# Altium PCB PCB.PcbDoc
Units mm, origin at the board's own origin, x right, y up, seen from the top; angles counter-clockwise.
Board outline 21.84 x 61.98 mm, 2 copper layers (Top Layer, Bottom Layer), stack 1.271 mm thick; 9 components, 0 nets, 138 pads, 9 vias.
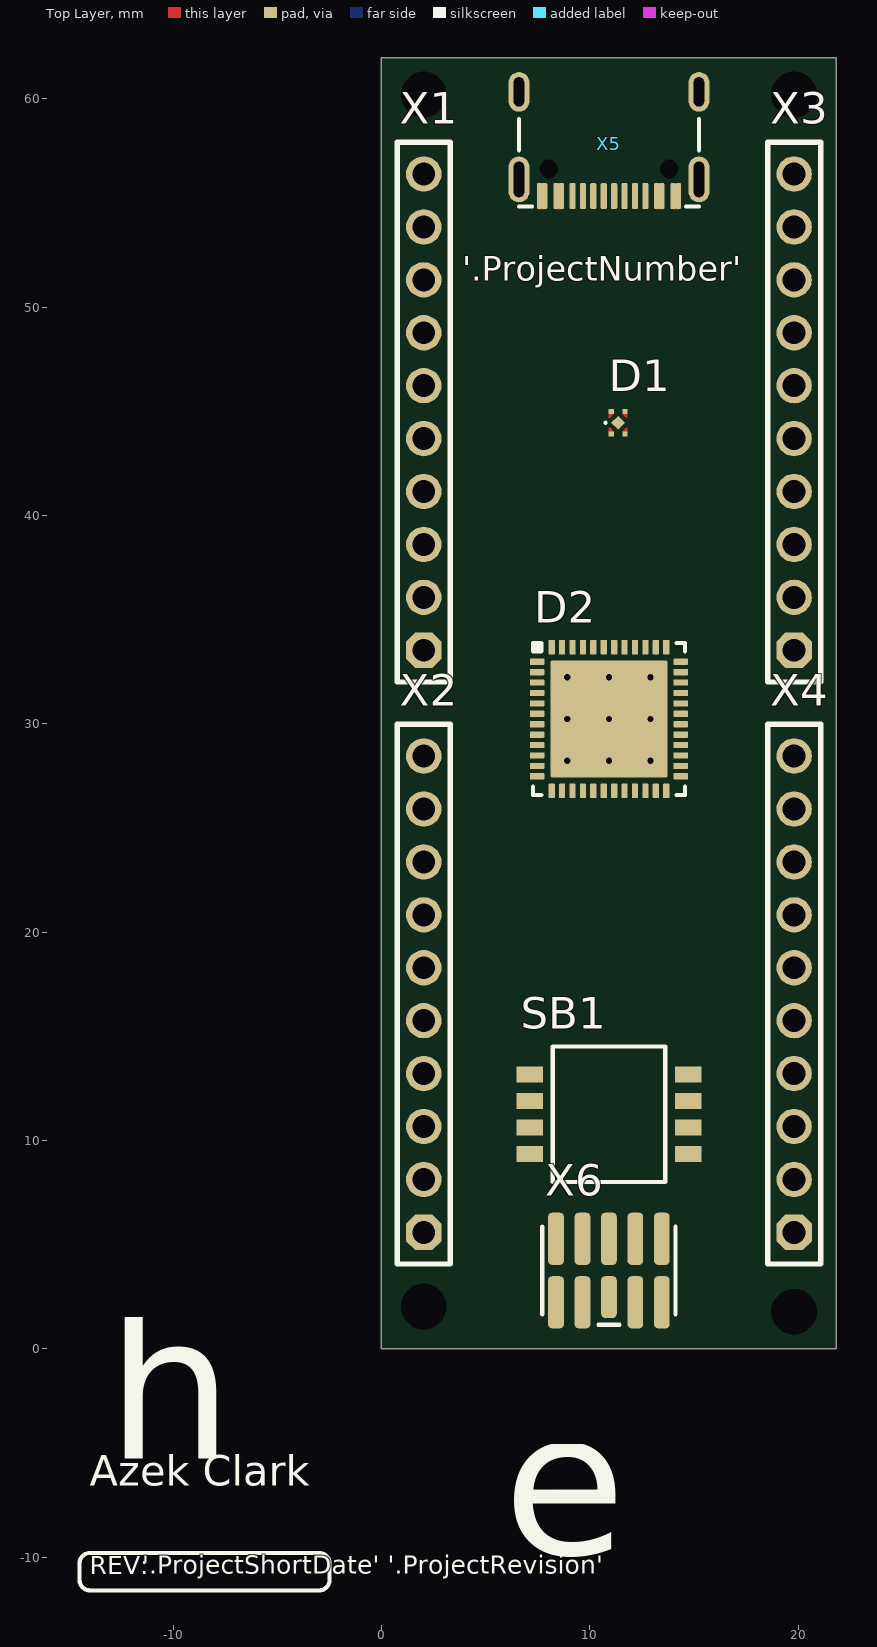
[diagram p0: Top Layer view]
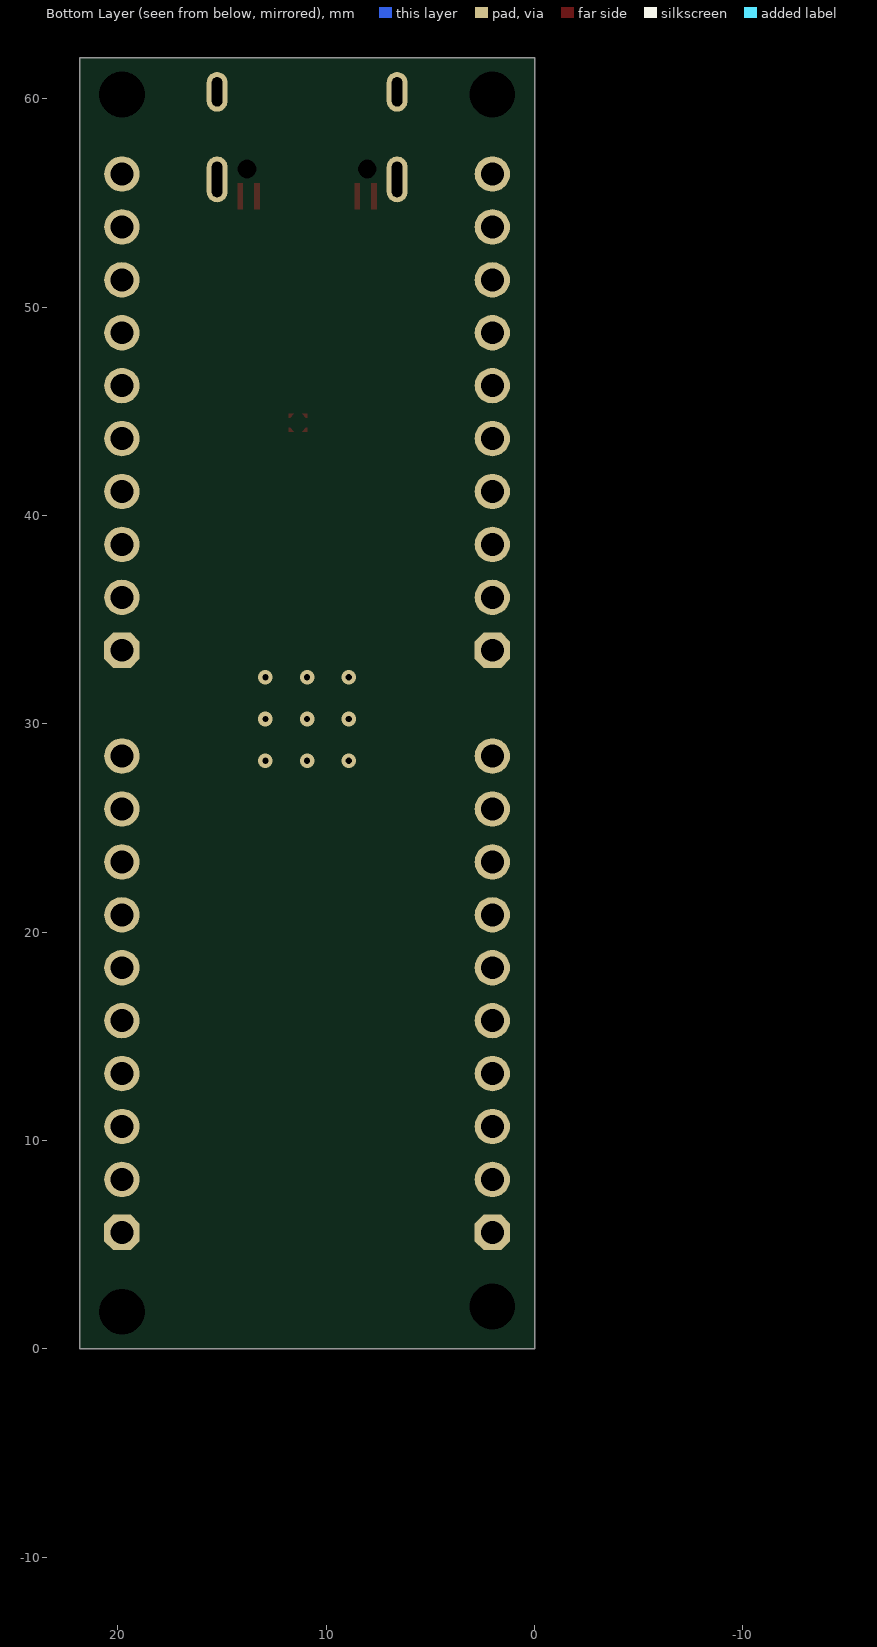
[diagram p1: Bottom Layer view, seen from below]

## Layer stack, top to bottom
Top Solder: solder mask 0.0102, Solder Resist, Dk 3.5
Top Layer: signal copper 0.0356
Dielectric 1: dielectric 1.2, FR-4, Dk 4.8
Bottom Layer: signal copper 0.0356
Bottom Solder: solder mask 0.0102, Solder Resist, Dk 3.5

## Board outline
0,0 0,61.976 21.844,61.976 21.844,0

## Design rules (kind name [scope] priority, off if disabled: settings)
AcuteAngle [All] p1: minimum=4.50000000000000E+0001 checktracksonly=TRUE
BoardOutlineClearance [All] p1: gap=0.3 ignorepadtopadclearanceinfootprint=FALSE
Clearance Clearance_NPTH [All vs InPadClass('NPTH')] p1: gap=0.4 ignorepadtopadclearanceinfootprint=FALSE except(0: Arc-Hole Track-Hole SMDPad-Hole THPad-Hole Via-Hole Fill-Hole Poly-Hole Region-Hole Text-Hole)
Clearance Clearance_MultiLayerPad [OnLayer('Multi-Layer') and IsPad] p2: gap=0.25 ignorepadtopadclearanceinfootprint=FALSE except(0: Arc-Hole Track-Hole SMDPad-Hole THPad-Hole Via-Hole Fill-Hole Poly-Hole Region-Hole Text-Hole)
Clearance Clearance_Polygon [InPolygon] p3: gap=0.2 ignorepadtopadclearanceinfootprint=FALSE except(0: Arc-Hole Track-Hole SMDPad-Hole THPad-Hole Via-Hole Fill-Hole Poly-Hole Region-Hole Text-Hole)
Clearance [All] p4: gap=0.15 ignorepadtopadclearanceinfootprint=FALSE except(0: Arc-Hole Track-Hole SMDPad-Hole THPad-Hole Via-Hole Fill-Hole Poly-Hole Region-Hole Text-Hole; 0.127: Arc-Arc Arc-Track Track-Track)
ComponentClearance [All] p1: gap=0.254 collisioncheckmode=3 verticalgap=0.2 showdistances=FALSE
DiffPairsRouting [All] p1: maxlimit=0.254 minlimit=0.2 mostfreqgap=0.254 toplayer_minwidth=0.2 toplayer_maxwidth=0.5 toplayer_prefwidth=0.3 bottomlayer_minwidth=0.2 bottomlayer_maxwidth=0.5 bottomlayer_prefwidth=0.3 maxuncoupledlength=12.7
Height [All] p1: minheight=0 maxheight=60 prefheight=12.7
HoleSize [All] p1: absolutevalues=TRUE maxlimit=6.3 minlimit=0.3 maxpercent=80.000 minpercent=20.000
HoleToHoleClearance [All] p1: gap=0.5 allowstackedmicrovias=TRUE
MinimumAnnularRing [All] p1: minimumring=0.13
MinimumSolderMaskSliver [All] p1: minsoldermaskwidth=0.05
PasteMaskExpansion [All] p1: expansion=-0.05
PlaneClearance [All] p1: clearance=0.5
PlaneConnect [All] p1: planeconnectstyle=Relief reliefexpansion=0.5 reliefentries=4 reliefconductorwidth=0.3 reliefairgap=0.2
PolygonConnect PolygonConnect_PowerPAD [All vs InPadClass('PowerPAD')] p1: connectstyle=Relief reliefconductorwidth=1 reliefentries=4 polygonreliefangle="90 Angle" airgapwidth=0.3
PolygonConnect PolygonConnect_PadGND [InNet('GND') and IsPad] p2: connectstyle=Relief reliefconductorwidth=0.5 reliefentries=4 polygonreliefangle="90 Angle" airgapwidth=0.2
PolygonConnect PolygonConnect_Via [IsVia] p3: connectstyle=Direct reliefconductorwidth=0.254 reliefentries=4 polygonreliefangle="90 Angle" airgapwidth=0.254
PolygonConnect [All] p4: connectstyle=Relief reliefconductorwidth=0.6 reliefentries=4 polygonreliefangle="90 Angle" airgapwidth=0.3
RoomDefinition MCU-Debug [InComponentClass('MCU-Debug')] p1: confinementstyle=ConfineIn formatcopy=TRUE lockcomponents=FALSE outline 6,0.504 15.75,0.504 15.75,15.004 6,15.004
RoomDefinition Connector-USB [InComponentClass('Connector-USB')] p2: confinementstyle=ConfineIn formatcopy=TRUE lockcomponents=FALSE outline 5.798,54.4 5.798,63.233 16.046,63.233 16.046,54.4
RoomDefinition Connector-Side-2 [InComponentClass('Connector-Side-2')] p3: confinementstyle=ConfineIn formatcopy=TRUE lockcomponents=FALSE outline 18.002,3.524 21.558,3.524 21.558,58.388 18.002,58.388
RoomDefinition Connector-Side-1 [InComponentClass('Connector-Side-1')] p4: confinementstyle=ConfineIn formatcopy=TRUE lockcomponents=FALSE outline 0.222,3.524 3.778,3.524 3.778,58.388 0.222,58.388
RoomDefinition "Power Supply" [InComponentClass('Power Supply')] p5: confinementstyle=ConfineIn formatcopy=TRUE lockcomponents=FALSE outline 10.022,43.434 12.922,43.434 12.922,47.834 10.022,47.834
RoomDefinition MCU-Power [InComponentClass('MCU-Power')] p6: confinementstyle=ConfineIn formatcopy=TRUE lockcomponents=FALSE outline 6.818,26.122 6.818,34.33 15.026,34.33 15.026,26.122
RoutingVias [All] p1: holewidth=0.3 width=0.7 viastyle="Through Hole" minholewidth=0.3 minwidth=0.6 maxholewidth=0.5 maxwidth=1.2
SilkToSilkClearance [All] p1: silktosilkclearance=0
SilkToSolderMaskClearance [IsPad] p1: minsilkscreentomaskgap=0.15 clearancetoexposedcopper=TRUE
SolderMaskExpansion SolderMaskExpansion_VIa [isVia] p1: expansion=0.102 istentingtop=TRUE
SolderMaskExpansion [All] p2: expansion=0.05 istentingtop=FALSE
UnRoutedNet [All] p1: checkbadconnections=TRUE
Width [All] p1: maxlimit=10 minlimit=0.127 preferedwidth=0.2
18 further rules are at their usual default settings.

## Classes and differential pairs
component class MCU-Debug: SB1 X6
component class Connector-USB: X5
component class Connector-Side-2: X3 X4
component class Connector-Side-1: X1 X2
component class "Power Supply": D1
component class MCU-Power: D2

## Components (designator, comment, footprint, x,y, rotation, side; value= is the part's Value field where it differs from the comment)
D1 "AP7343D-xXXFS4-7B" DFN1010-4 11.362,44.448 r0 top
D2 "STM32F411CxU6" 48-UFQFPN 10.922,30.226 r0 top
SB1 "" "BUT: DSHP04TS" 10.922,11.254 r90 top
X1 "PBSL-10" "CON: PBSL-10" 2.032,44.958 r90 top
X2 "PBSL-10" "CON: PBSL-10" 2.032,17.018 r90 top
X3 "PBSL-10" "CON: PBSL-10" 19.812,44.958 r90 top
X4 "PBSL-10" "CON: PBSL-10" 19.812,17.018 r90 top
X5 "918-418K2023S40001" "CON:  918-418K2023S40001" 10.922,58.954 r180 top
X6 "" "CON: PLLD-1.27-10" 10.922,3.754 r0 top

## Footprints (in the part's own frame and the unit in brackets; to place one, negate y for a bottom-side part, rotate by r counter-clockwise, add the part's x,y. Pads: shape width x height; smd on the part's side, far side on the other; paste and mask are expansions set on the pad)
48-UFQFPN [mm] "48-lead, 7 x 7 mm, 0.5 mm pitch"
  rrect2% 5.6x5.6 smd paste-10: 0(0,0)
  rrect25% 0.7x0.3 smd paste-0.025: 1(-3.45,2.75) 2(-3.45,2.25) 3(-3.45,1.75) 4(-3.45,1.25) 5(-3.45,0.75) 6(-3.45,0.25) 7(-3.45,-0.25) 8(-3.45,-0.75) 9(-3.45,-1.25) 10(-3.45,-1.75) 11(-3.45,-2.25) 12(-3.45,-2.75) 25(3.45,-2.75) 26(3.45,-2.25) 27(3.45,-1.75) 28(3.45,-1.25) 29(3.45,-0.75) 30(3.45,-0.25) 31(3.45,0.25) 32(3.45,0.75) 33(3.45,1.25) 34(3.45,1.75) 35(3.45,2.25) 36(3.45,2.75)
  rrect25% 0.3x0.7 smd paste-0.025: 13(-2.75,-3.45) 14(-2.25,-3.45) 15(-1.75,-3.45) 16(-1.25,-3.45) 17(-0.75,-3.45) 18(-0.25,-3.45) 19(0.25,-3.45) 20(0.75,-3.45) 21(1.25,-3.45) 22(1.75,-3.45) 23(2.25,-3.45) 24(2.75,-3.45) 37(2.75,3.45) 38(2.25,3.45) 39(1.75,3.45) 40(1.25,3.45) 41(0.75,3.45) 42(0.25,3.45) 43(-0.25,3.45) 44(-0.75,3.45) 45(-1.25,3.45) 46(-1.75,3.45) 47(-2.25,3.45) 48(-2.75,3.45)
  silkscreen extent -3.65,-3.65 3.65,3.65, body extent -3.57,-3.57 3.58,3.58, height 0.6
"BUT: DSHP04TS" [mm] "Switches array 4-bit, 1.27 pitch"
  rect 0.76x1.27 smd: 1(-1.904,-3.81) 2(-0.634,-3.81) 3(0.636,-3.8) 4(1.906,-3.81) 5(1.906,3.8) 6(0.636,3.8) 7(-0.634,3.8) 8(-1.904,3.8)
  silkscreen extent -3.25,-2.7 3.25,2.7, body extent -3.26,-4.12 3.26,4.13, height 2.55
"CON:  918-418K2023S40001" [mm] "USB-C 12(16)-pin (no usb3 diff pairs) female connector"
  rrect50% 0x0 hole 0.9 unplated: 0(-2.89,2.325) 0(2.89,2.325)
  rrect50% 0.25x1.25 smd: A1(-3.335,3.625) A4(-2.535,3.625) A9(2.535,3.625) A12(3.335,3.625) B1(3.085,3.625) B4(2.285,3.625) B9(-2.285,3.625) B12(-3.085,3.625)
  rrect50% 0.3x1.25 smd: A5(-1.25,3.625) A6(-0.25,3.625) A7(0.25,3.625) A8(1.25,3.625) B5(1.75,3.625) B6(0.75,3.625) B7(-0.75,3.625) B8(-1.75,3.625)
  oval 1x1.9 hole 0.5 slot 1.4 at 90 deg: SHIELD(-4.32,-1.375) SHIELD(4.32,-1.375)
  oval 1x2.2 hole 0.5 slot 1.7 at 90 deg: SHIELD(-4.32,2.825) SHIELD(4.32,2.825)
  Top Layer region: -3.335,4.25 -3.335,3 -3.085,3 -3.085,4.25
  Top Layer region: -2.535,4.25 -2.535,3 -2.285,3 -2.285,4.25
  Top Layer region: 2.285,4.25 2.285,3 2.535,3 2.535,4.25
  Top Layer region: 3.085,4.25 3.085,3 3.335,3 3.335,4.25
  silkscreen extent -4.32,-0.07 4.32,4.13, body extent -4.42,-3.97 4.42,3.97, height 3.21
"CON: PBSL-10" [mm] "Female header 2.54mm pitch, pin lengh 11mm"
  oct 1.7x1.7 hole 1.1: 1(-11.43,0)
  round 1.7 hole 1.1: 2(-8.89,0) 3(-6.35,0) 4(-3.81,0) 5(-1.27,0) 6(1.27,0) 7(3.81,0) 8(6.35,0) 9(8.89,0) 10(11.43,0)
  silkscreen extent -12.95,-1.27 12.95,1.27, body extent -12.95,-1.25 12.95,1.25, height 8.5
"CON: PLLD-1.27-10" [mm] "Male header 1.27mm pitch. smt version"
  rrect50% 0.75x2.5 smd: 1(-2.54,-1.524) 2(-2.54,1.524) 3(-1.27,-1.524) 4(-1.27,1.524) 6(0,1.524) 7(1.27,-1.524) 8(1.27,1.524) 9(2.54,-1.524) 10(2.54,1.524)
  rrect50% 0.75x2 smd: 5(0,-1.275)
  silkscreen extent -3.2,-2.6 3.2,2.1, body extent -3.17,-2.12 3.17,2.11, height 5.9
DFN1010-4 [mm] "4-Leads, Body 1.0x1.0mm (max), Pitch 0,65mm"
  rect 0.48x0.48 smd rot 45 paste+0: 0(0,0)
  rect 0.25x0.22 smd paste+0: 1(-0.325,0.54) 2(0.325,0.54) 3(0.325,-0.54) 4(-0.325,-0.54)
  Top Layer region: -0.2,0.43 -0.45,0.43 -0.45,0.25 -0.38,0.25
  Top Layer region: 0.2,-0.43 0.45,-0.43 0.45,-0.25 0.38,-0.25
  Top Layer region: -0.2,-0.43 -0.45,-0.43 -0.45,-0.25 -0.38,-0.25
  Top Layer region: 0.2,0.43 0.45,0.43 0.45,0.25 0.38,0.25
  silkscreen extent -0.65,-0.05 -0.55,0.05, body extent -0.52,-0.52 0.53,0.53, height 0.4

## Part data
D1: library part AP7343, "LDO", Manufacturer="Diodes Incorporated", ComponentKind="DFN1010-4, 5.25V, 300mA", HelpURL=https://lcsc.com/product-detail/Dropout-Regulators-LDO_Diodes-Incorporated-AP7343D-33FS4-7B_C260892.html, Model=AP7343D-xXXFS4-7B
D2: "STM32, Cortex-M4", Manufacturer="ST Microelectronics", ComponentKind="STM32, 2.0-3.6V, 48-UFQFPN", HelpURL=https://datasheet.lcsc.com/lcsc/2107091825_STMicroelectronics-STM32F411VCT6_C1339312.pdf, Model=STM32F411CxU6
SB1: library part 4-Switch, "4 Array, latching"
X1 X2 X3 X4 X6: library part 10-Connector
  X1 X2 X3 X4: Model=PBSL-10
X5: library part USB-C-12(16), "USB-C 2.0 12(16)-pin", Model=918-418K2023S40001

## Free pads (board coordinates)
  round 0 hole 2.2 unplated paste+0 mask+0.1: 0(2.032,2.032) 0(2.032,60.198) 0(19.812,60.198)
  round 0 hole 2.2 unplated paste+0: 0(19.812,1.778)

## Via types
v1: diameter 0.7, hole 0.3, Top Layer to Bottom Layer, tented both sides, 9 vias

## Nets (pads, with @x,y where several pads share a name; then routed paths per layer and width w, separated by ;. In a path a pad name is that pad's centre, name@x,y a point inside that pad or via, vN(x,y) a via of type N, cw(c..) or ccw(c..) an arc to the next point about the centre after c; other vN are vias at no path point)
pads on no net: D1.0 D1.1 D1.2 D1.3 D1.4 D2.0 D2.1 D2.2 D2.3 D2.4 D2.5 D2.6 D2.7 D2.8 D2.9 D2.10 D2.11 D2.12 D2.13 D2.14 D2.15 D2.16 D2.17 D2.18 D2.19 D2.20 D2.21 D2.22 D2.23 D2.24 D2.25 D2.26 D2.27 D2.28 D2.29 D2.30 D2.31 D2.32 D2.33 D2.34 D2.35 D2.36 D2.37 D2.38 D2.39 D2.40 D2.41 D2.42 D2.43 D2.44 D2.45 D2.46 D2.47 D2.48 SB1.1 SB1.2 SB1.3 SB1.4 SB1.5 SB1.6 SB1.7 SB1.8 X1.1 X1.2 X1.3 X1.4 X1.5 X1.6 X1.7 X1.8 X1.9 X1.10 X2.1 X2.2 X2.3 X2.4 X2.5 X2.6 X2.7 X2.8 X2.9 X2.10 X3.1 X3.2 X3.3 X3.4 X3.5 X3.6 X3.7 X3.8 X3.9 X3.10 X4.1 X4.2 X4.3 X4.4 X4.5 X4.6 X4.7 X4.8 X4.9 X4.10 X5.0 X5.A1 X5.A4 X5.A5 X5.A6 X5.A7 X5.A8 X5.A9 X5.A12 X5.B1 X5.B4 X5.B5 X5.B6 X5.B7 X5.B8 X5.B9 X5.B12 X5.SHIELD X6.1 X6.2 X6.3 X6.4 X6.5 X6.6 X6.7 X6.8 X6.9 X6.10
copper on no net:
  other v1: 8.922,28.226 10.922,28.226 12.922,28.226 8.922,30.226 10.922,30.226 12.922,30.226 8.922,32.226 10.922,32.226 12.922,32.226

## Silkscreen, mask and mechanical layers (free items; w line width, h text height)
Top Overlay:
  lines w0.2: -14.488,-10.302 cw(c-13.988,-10.302) -13.988,-9.802 -2.988,-9.802 cw(c-2.988,-10.302) -2.488,-10.302 -2.488,-11.102 cw(c-2.988,-11.102) -2.988,-11.602 -13.988,-11.602 cw(c-13.988,-11.102) -14.488,-11.102 -14.488,-10.302 ; -14.488,-10.302 -14.488,-10.302
  text "'.ProjectNumber'" at 3.875,50.879 h2
  text "Azek Clark" at -13.996,-7.062 h2.5
  text "h" at -13.178,-8.108 h15
  text "'.ProjectShortDate' '.ProjectRevision'" at -11.488,-11.091 h1.5
  text "REV:" at -13.988,-11.102 h1.5
  text "e" at 5.849,-12.704 h15
Board Shape:
  the board outline again, w0.2